# Altium PCB Motherboard.PcbDoc
Units mil, origin at the board's own origin, x right, y up, seen from the top; angles counter-clockwise.
Board outline 6000 x 4000 mil, 2 copper layers (Top Layer, Bottom Layer); 57 components, 99 nets, 359 pads, 0 vias.
Unrouted connection lines stored in the file: 239.
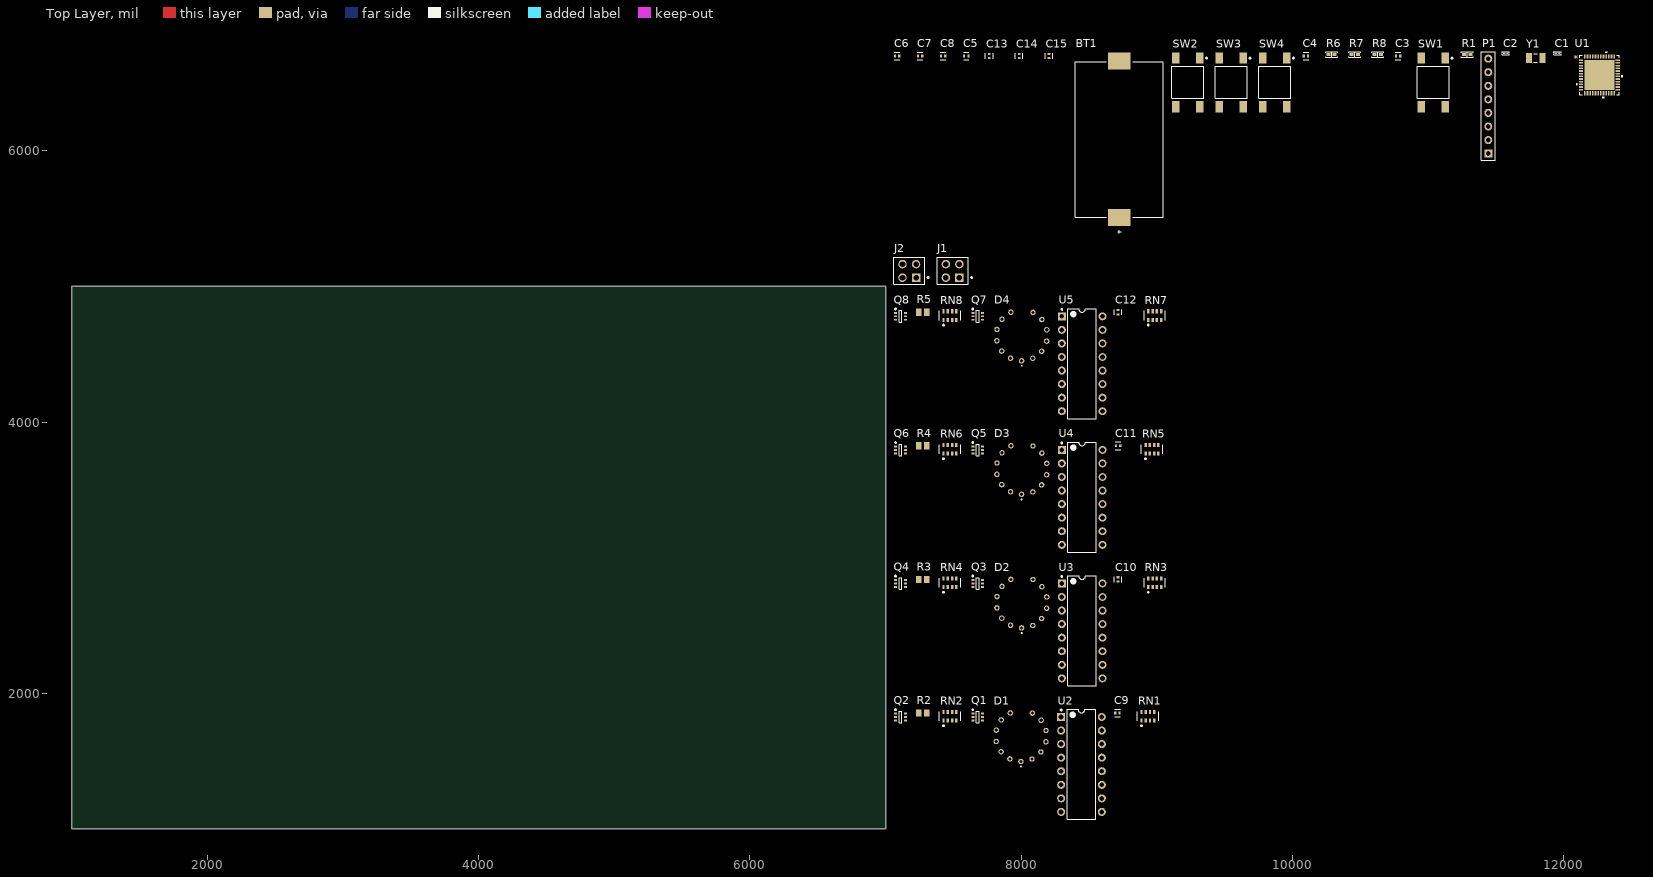
[diagram p0: Top Layer view]
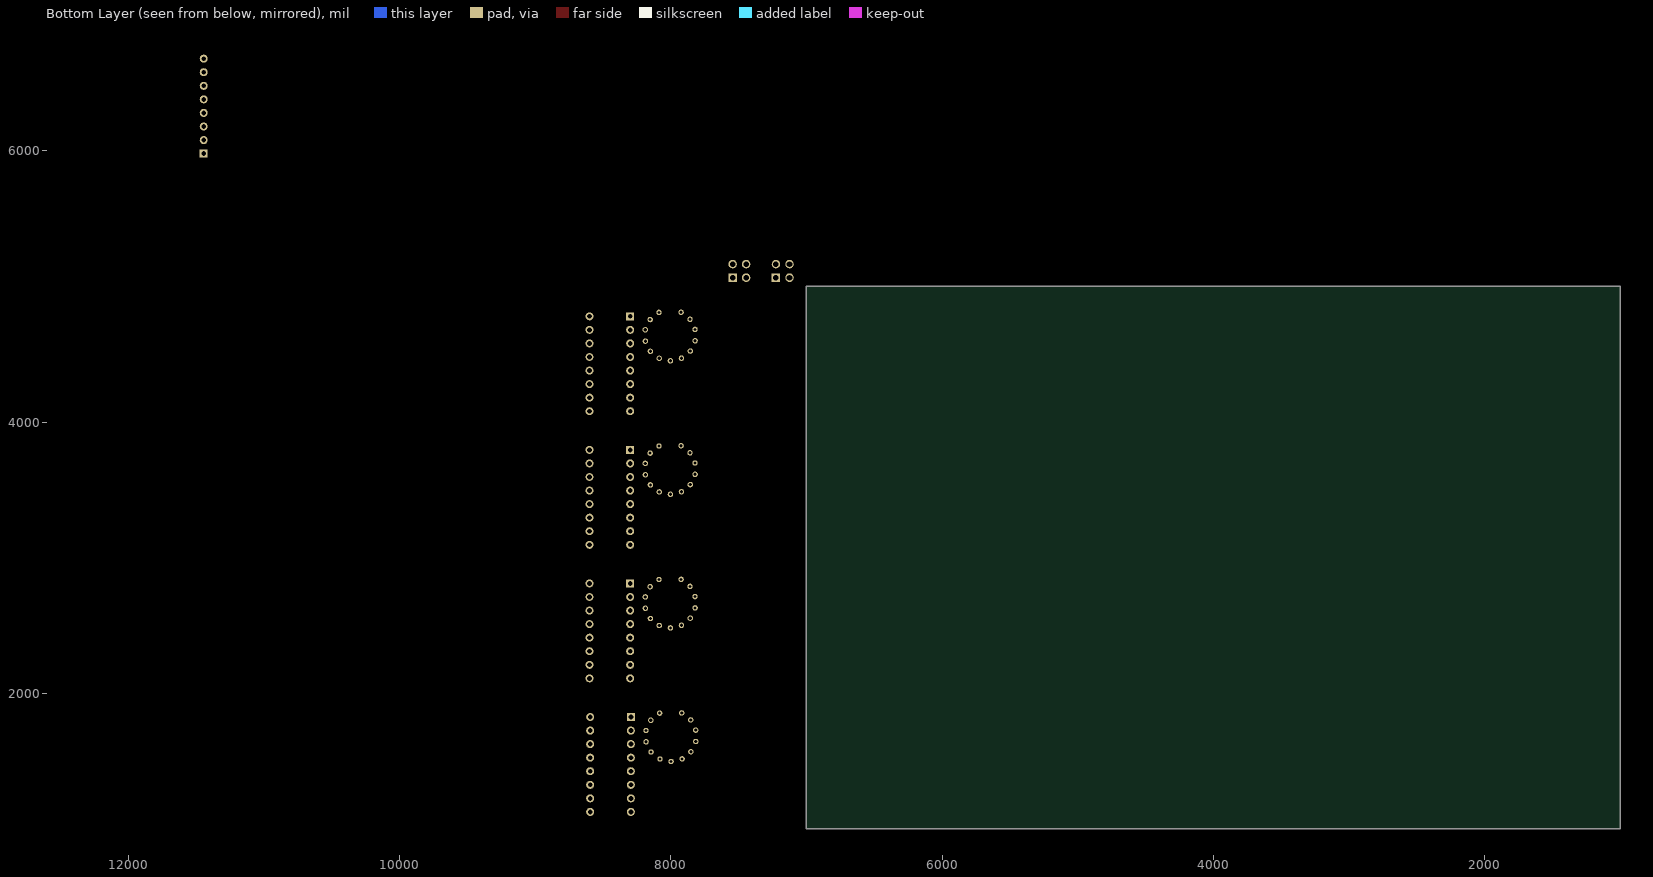
[diagram p1: Bottom Layer view, seen from below]

## Layer stack, top to bottom
Top Solder: solder mask 0.4, Solder Resist, Dk 3.5
Top Layer: signal copper 1.4
Dielectric 1: dielectric 12.6, FR-4, Dk 4.8
Bottom Layer: signal copper 1.4
Bottom Solder: solder mask 0.4, Solder Resist, Dk 3.5

## Board outline
1000,1000 7000,1000 7000,5000 1000,5000

## Design rules (kind name [scope] priority, off if disabled: settings)
Clearance [All] p1: gap=10 ignorepadtopadclearanceinfootprint=FALSE except(0: Arc-Hole Track-Hole SMDPad-Hole THPad-Hole Via-Hole Fill-Hole Poly-Hole Region-Hole Text-Hole)
PolygonConnect [All] p1: connectstyle=Relief reliefconductorwidth=10 reliefentries=4 polygonreliefangle="90 Angle" airgapwidth=10
RoomDefinition Designator_5 [InComponentClass('Designator')] p1: confinementstyle=ConfineIn formatcopy=TRUE lockcomponents=FALSE outline 7045,4015 9090,4015 9090,4950 7045,4950
RoomDefinition Designator_4 [InComponentClass('Designator')] p2: confinementstyle=ConfineIn formatcopy=TRUE lockcomponents=FALSE outline 7045,4015 9090,4015 9090,4950 7045,4950
RoomDefinition Designator_2 [InComponentClass('Designator')] p3: confinementstyle=ConfineIn formatcopy=TRUE lockcomponents=FALSE outline 7045,4015 9090,4015 9090,4950 7045,4950
RoomDefinition Designator [InComponentClass('Designator')] p4: confinementstyle=ConfineIn formatcopy=TRUE lockcomponents=FALSE outline 7045,4015 9090,4015 9090,4950 7045,4950
RoutingVias [All] p1: holewidth=28 width=50 viastyle="Through Hole" minholewidth=28 minwidth=50 maxholewidth=28 maxwidth=50
SolderMaskExpansion [All] p1: expansion=4 istentingtop=FALSE
Width [All] p1: maxlimit=10 minlimit=10 preferedwidth=10
30 further rules are at their usual default settings.

## Classes and differential pairs
component class Designator: C12 D4 Q7 Q8 R5 RN7 RN8 U5

## Components (designator, comment, footprint, x,y, rotation, side; value= is the part's Value field where it differs from the comment)
BT1 "CR2032-BS-6-1" FP-BU2032SM-BT-GTR-MFG 8725,6085 r90 top
C1 "10 pF" "CAP 0201_0603" 11955,6720 r0 top
C2 "10 pF" "CAP 0201_0603" 11575,6720 r0 top
C3 "100nF" FP-C1005-050-0_15-MFG 10780,6700 r0 top
C4 "4.7uF" FP-C1005-050-0_15-MFG 10100,6700 r0 top
C5 "1uF" FP-C1005-050-0_15-MFG 7595,6700 r0 top
C6 "100nF" FP-C1005-050-0_15-MFG 7085,6700 r0 top
C7 "100nF" FP-C1005-050-0_15-MFG 7255,6700 r0 top
C8 "100nF" FP-C1005-050-0_15-MFG 7425,6700 r0 top
C9 "100nF" FP-C1005-050-0_15-MFG 8710,1855 r0 top
C10 "100nF" FP-C1005-050-0_15-MFG 8715,2840 r90 top
C11 "100nF" FP-C1005-050-0_15-MFG 8715,3825 r0 top
C12 "100nF" FP-C1005-050-0_15-MFG 8715,4810 r90 top
C13 "100nF" FP-C1005-050-0_15-MFG 7765,6700 r90 top
C14 "100nF" FP-C1005-050-0_15-MFG 7985,6700 r90 top
C15 "100nF" FP-C1005-050-0_15-MFG 8205,6700 r90 top
D1 "Z5730M" Z5730M 8000,1685 r0 top
D2 "Z5730M" Z5730M 8005,2670 r0 top
D3 "Z5730M" Z5730M 8005,3655 r0 top
D4 "Z5730M" Z5730M 8005,4640 r0 top
J1 "SSW-102-02-G-D" FP-SSW-102-02-G-D-MFG 7495,5115 r0 top
J2 "SSW-102-02-G-D" FP-SSW-102-02-G-D-MFG 7175,5115 r0 top
P1 "Header 8" HDR1X8 11445,5980 r90 top
Q1 "PMGD780SN,115" NXP-SOT363_N 7680,1825 r0 top
Q2 "PMGD780SN,115" NXP-SOT363_N 7110,1825 r0 top
Q3 "PMGD780SN,115" NXP-SOT363_N 7680,2810 r0 top
Q4 "PMGD780SN,115" NXP-SOT363_N 7110,2810 r0 top
Q5 "PMGD780SN,115" NXP-SOT363_N 7680,3795 r0 top
Q6 "PMGD780SN,115" NXP-SOT363_N 7110,3795 r0 top
Q7 "PMGD780SN,115" NXP-SOT363_N 7680,4780 r0 top
Q8 "PMGD780SN,115" NXP-SOT363_N 7110,4780 r0 top
R1 "10 kOhms" "RES 0402_1005" 11290,6710 r0 top
R2 "18k" RESC2013X60X40LL20T25 7275,1855 r0 top
R3 "18k" RESC2013X60X40LL20T25 7275,2840 r0 top
R4 "18k" RESC2013X60X40LL20T25 7275,3825 r0 top
R5 "18k" RESC2013X60X40LL20T25 7275,4810 r0 top
R6 "10 kOhms" "RES 0402_1005" 10290,6710 r0 top
R7 "10 kOhms" "RES 0402_1005" 10460,6710 r0 top
R8 "10 kOhms" "RES 0402_1005" 10630,6710 r0 top
RN1 "10k 0603x4" FP-EXB38V-MFG 8935,1830 r0 top
RN2 "10k 0603x4" FP-EXB38V-MFG 7475,1830 r0 top
RN3 "10k 0603x4" FP-EXB38V-MFG 8985,2815 r0 top
RN4 "10k 0603x4" FP-EXB38V-MFG 7475,2815 r0 top
RN5 "10k 0603x4" FP-EXB38V-MFG 8965,3800 r0 top
RN6 "10k 0603x4" FP-EXB38V-MFG 7475,3800 r0 top
RN7 "10k 0603x4" FP-EXB38V-MFG 8985,4785 r0 top
RN8 "10k 0603x4" FP-EXB38V-MFG 7475,4785 r0 top
SW1 "FSM6JSMA" TECO-FSM6JSMA_V 11040,6505 r0 top
SW2 "FSM6JSMA" TECO-FSM6JSMA_V 9230,6505 r0 top
SW3 "FSM6JSMA" TECO-FSM6JSMA_V 9550,6505 r0 top
SW4 "FSM6JSMA" TECO-FSM6JSMA_V 9870,6505 r0 top
U1 "STM32F411CCU6TR" UFQFPN-48_7X7X0P55MM 12265,6560 r0 top
U2 "74141" DIP-16 8445,1475 r0 top
U3 "74141" DIP-16 8450,2460 r0 top
U4 "74141" DIP-16 8450,3445 r0 top
U5 "74141" DIP-16 8450,4430 r0 top
Y1 "ABS07-32.768KHZ-7-T" FP-ABS07-MFG 11795,6685 r0 top

## Footprints (in the part's own frame and the unit in brackets; to place one, negate y for a bottom-side part, rotate by r counter-clockwise, add the part's x,y. Pads: shape width x height; smd on the part's side, far side on the other; paste and mask are expansions set on the pad)
"CAP 0201_0603" [mm] "Chip Capacitor, 2-Leads, Body 0.60x0.30mm, IPC Medium Density"
  rect 0.4x0.35 smd: 1(-0.31,0) 2(0.31,0)
  silkscreen extent -0.67,-0.33 0.67,0.33, body extent -0.3,-0.15 0.3,0.15, height 0.3
DIP-16 [mm] "DIP; 16 Leads; Row Spacing 7.62 mm; Pitch 2.54 mm"
  rect 1.5x1.5 hole 0.9: 1(-3.81,8.89)
  round 1.5 hole 0.9: 2(-3.81,6.35) 3(-3.81,3.81) 4(-3.81,1.27) 5(-3.81,-1.27) 6(-3.81,-3.81) 7(-3.81,-6.35) 8(-3.81,-8.89) 9(3.81,-8.89) 10(3.81,-6.35) 11(3.81,-3.81) 12(3.81,-1.27) 13(3.81,1.27) 14(3.81,3.81) 15(3.81,6.35) 16(3.81,8.89)
  silkscreen extent -3.93,-10.3 2.65,10.31, body extent -3.6,-10.28 3.6,10.28, height 5.08
FP-ABS07-MFG [mm]
  rect 1.1x1.9 smd paste+0 mask+0: 1(-1.25,0) 2(1.25,0)
  silkscreen extent -0.33,-0.8 0.33,0.8, body extent -1.9,-1.05 1.9,1.05, height 0.25
FP-BU2032SM-BT-GTR-MFG [mm]
  rect 3.2x4.2 smd paste+0 mask+0: 1(14.65,0) 2(-14.65,0)
  silkscreen extent -17.6,-8.25 14.55,8.25, body extent -16.35,-8.35 16.35,8.35, height 0.25
FP-C1005-050-0_15-MFG [mm]
  rect 0.4x0.5 smd paste+0 mask+0: 1(-0.4,0) 2(0.4,0)
  silkscreen extent -0.5,-0.72 0.5,0.72, body extent -0.7,-0.43 0.7,0.43, height 0.25
FP-EXB38V-MFG [mm]
  rect 0.45x0.8 smd paste+0 mask+0: 1(-1.2,-0.8) 2(-0.4,-0.8) 3(0.4,-0.8) 4(1.2,-0.8) 5(1.2,0.8) 6(0.4,0.8) 7(-0.4,0.8) 8(-1.2,0.8)
  silkscreen extent -2,-1.9 2,0.87, body extent -1.8,-1.3 1.8,1.3, height 0.25
FP-SSW-102-02-G-D-MFG [mm]
  rect 1.59x1.59 hole 1.04 paste-1000 mask+0: 1(1.27,-1.27)
  round 1.59 hole 1.04 paste-1000 mask+0: 2(1.27,1.27) 3(-1.27,-1.27) 4(-1.27,1.27)
  silkscreen extent -2.92,-2.54 3.66,2.54, body extent -3.02,-2.64 3.02,2.64, height 0.25
HDR1X8 [mm] "Connector; Header; 8 Position"
  rect 1.5x1.5 hole 0.9: 1(0,0)
  round 1.5 hole 0.9: 2(2.54,0) 3(5.08,0) 4(7.62,0) 5(10.16,0) 6(12.7,0) 7(15.24,0) 8(17.78,0)
  silkscreen extent -1.27,-1.27 19.05,1.27
NXP-SOT363_N [mm] "SOT23, 6-Leads, Body 2.2x1.35mm, Pitch 0.65mm, IPC Medium Density"
  rect 0.55x0.35 smd: 1(-0.925,0.65) 2(-0.925,0) 3(-0.925,-0.65) 4(0.925,-0.65) 5(0.925,0) 6(0.925,0.65)
  silkscreen extent -1.05,-1.1 0.25,1.5, body extent -0.67,-1.1 0.67,1.1, height 1.1
"RES 0402_1005" [mm] "Chip Resistor, 2-Leads, Body 1.0x0.5mm, IPC Medium Density"
  rect 0.75x0.6 smd: 1(-0.575,0) 2(0.575,0)
  silkscreen extent -1.14,-0.51 1.14,0.51, body extent -0.5,-0.25 0.5,0.25, height 0.35
RESC2013X60X40LL20T25 [mm] "Chip Resistor, 2-Leads, Body 2.00x1.25mm, IPC High Density"
  rect 1x1.35 smd: 1(-0.75,0) 2(0.75,0)
  body extent -1.1,-0.72 1.1,0.72, height 0.6
TECO-FSM6JSMA_V [mm] "SMD, 4-Leads, Body 6x6mm, Pitch 4.5mm"
  rect 1.4x2.1 smd: 1(2.25,4.55) 2(2.25,-4.55) 3(-2.25,4.55) 4(-2.25,-4.55)
  silkscreen extent -3,-3 3.63,4.67, body extent -3,-5 3,5, height 7.11
UFQFPN-48_7X7X0P55MM [mil]
  rect 32x12 smd paste+0 mask+0: 1(-136,108.27) 2(-136,88.58) 3(-136,68.9) 4(-136,49.21) 5(-136,29.53) 6(-136,9.84) 7(-136,-9.84) 8(-136,-29.53) 9(-136,-49.21) 10(-136,-68.9) 11(-136,-88.58) 12(-136,-108.27) 25(136,-108.27) 26(136,-88.58) 27(136,-68.9) 28(136,-49.21) 29(136,-29.53) 30(136,-9.84) 31(136,9.84) 32(136,29.53) 33(136,49.21) 34(136,68.9) 35(136,88.58) 36(136,108.27)
  rect 12x32 smd paste+0 mask+0: 13(-108.27,-136) 14(-88.58,-136) 15(-68.9,-136) 16(-49.21,-136) 17(-29.53,-136) 18(-9.84,-136) 19(9.84,-136) 20(29.53,-136) 21(49.21,-136) 22(68.9,-136) 23(88.58,-136) 24(108.27,-136) 37(108.27,136) 38(88.58,136) 39(68.9,136) 40(49.21,136) 41(29.53,136) 42(9.84,136) 43(-9.84,136) 44(-29.53,136) 45(-49.21,136) 46(-68.9,136) 47(-88.58,136) 48(-108.27,136)
  rect 224x224 smd paste-111.5 mask+0: 49(0,0)
  silkscreen extent -172,-172 172,172, body extent -140,-140 140,140, height 24
Z5730M [mil]
  round 40 hole 23.62: 1(82.84,168.76) 2(147.86,116.11) 3(183.6,40.45) 4(182.97,-43.21) 5(146.1,-118.32) 6(80.3,-169.99) 7(-1.41,-187.99) 8(-82.84,-168.77) 9(-147.86,-116.11) 10(-183.59,-40.46) 11(-182.97,43.2) 12(-146.1,118.31) 13(-80.29,169.99)
  silkscreen extent -3,-227 2,-223

## Part data
BT1: library part CMP-136216-000002-1, Case/Package=SMD/SMT, Max Operating Temperature=280°C, Min Operating Temperature=-40°C, Package Quantity=400, Mount="Surface Mount", Number of Cells=1, Termination=SMD/SMT
C1 C2: library part C0201C100J3GAC7867, "CAP CER 10PF 25V C0G/NP0 0201", Device Package="0201 (0603 Metric)", manufacturer=KEMET, Operating Temperature="-55°C ~ 125°C", Supplier Part Number 1=399-14856-1-ND, Temperature Coefficient="C0G, NP0", Tolerance=±5%, Voltage - Rated=25V, Applications="General Purpose", Capacitance="10 pF", componentlink1description=Datasheet, componentlink1url=https://api.kemet.com/component-edge/download/datasheet/C0201C100J3GAC7867.pdf, componentlink2description="DigiKey Link", componentlink2url=https://www.digikey.com/en/products/detail/kemet/C0201C100J3GAC7867/7381972, Features="Low ESL", lastupdated="13.03.2023 19:01:22", Lifecycle Status=Active, Minimum Order=1, Mounting Type="Surface Mount, MLCC", Package / Case="0201 (0603 Metric)", packaging=TapeAndReel, Part Number=C0201C100J3GAC7867, Part Status=Active, partid=4, price=0.02, series="SMD Comm C0G", Size / Dimension="0.024\" L x 0.012\" W (0.60mm x 0.30mm)", Supplier 1=DigiKey, Thickness (Max)="0.013\" (0.33mm)"
C3 C6 C7 C8 C9 C10 C11 C12 C13 C14 C15: library part CMP-2000-05438-2, "CAP CER 100nF 10V X5R 0402", Capacitance=4.7uF, Case Code (Imperial)=0402, Case Code (Metric)=1005, Dielectric=X5R, Dielectric Material=Ceramic, Max Operating Temperature=85°C, Min Operating Temperature=-55°C, Package Quantity=1, Tolerance=20%, Voltage=10V, Case/Package=0402, Construction=Flat, Depth=0.5mm, Height=0.5mm, Lead Free="Lead Free", Length=1mm, Mount="Surface Mount", packaging="Tape and Reel", Radiation Hardening=No, REACH SVHC="No SVHC", Resistor Type=Ceramic, RoHS Compliant=Yes, series=C, Termination=SMD/SMT, Thickness=500um, Voltage Rating=10V, Voltage Rating (DC)=10V, Weight=2.3E-05oz, Width=0.02inch
C4: library part CMP-2000-05438-2, "CAP CER 4.7UF 10V X5R 0402", Case Code (Imperial)=0402, Case Code (Metric)=1005, Dielectric=X5R, Dielectric Material=Ceramic, Max Operating Temperature=85°C, Min Operating Temperature=-55°C, Package Quantity=1, Tolerance=20%, Voltage=10V, Capacitance=4.7uF, Case/Package=0402, Construction=Flat, Depth=0.5mm, Height=0.5mm, Lead Free="Lead Free", Length=1mm, Mount="Surface Mount", packaging="Tape and Reel", Radiation Hardening=No, REACH SVHC="No SVHC", Resistor Type=Ceramic, RoHS Compliant=Yes, series=C, Termination=SMD/SMT, Thickness=500um, Voltage Rating=10V, Voltage Rating (DC)=10V, Weight=2.3E-05oz, Width=0.02inch
C5: library part CMP-2000-05438-2, "CAP CER 1UF 10V X5R 0402", Capacitance=4.7uF, Case Code (Imperial)=0402, Case Code (Metric)=1005, Dielectric=X5R, Dielectric Material=Ceramic, Max Operating Temperature=85°C, Min Operating Temperature=-55°C, Package Quantity=1, Tolerance=20%, Voltage=10V, Case/Package=0402, Construction=Flat, Depth=0.5mm, Height=0.5mm, Lead Free="Lead Free", Length=1mm, Mount="Surface Mount", packaging="Tape and Reel", Radiation Hardening=No, REACH SVHC="No SVHC", Resistor Type=Ceramic, RoHS Compliant=Yes, series=C, Termination=SMD/SMT, Thickness=500um, Voltage Rating=10V, Voltage Rating (DC)=10V, Weight=2.3E-05oz, Width=0.02inch
J1 J2: library part CMP-02766-000581-1, "CONN RCPT 4POS 0.1 GOLD PCB", Color=Black, Current Rating=6.9A, Voltage Rating=550V, Connector Type=Receptacle, Contact Material=Bronze, Contact Plating=Gold, Gender=Receptacle, Housing Color=Black, Housing Material=Plastic, Lead Free="Lead Free", Mating Cycles=100, Mount="Through Hole", Number of Contacts=4, Number of Positions=4, Number of Rows=2, Orientation=Straight, packaging=Bulk, Pitch=2.54mm, Radiation Hardening=No, REACH SVHC="No SVHC", Row Spacing=0.1inch, Termination=Solder
P1: "Header, 8-Pin", LatestRevisionDate=17-Jul-2002, LatestRevisionNote="Re-released for DXP Platform.", Publisher="Altium Limited"
Q1 Q2 Q3 Q4 Q5 Q6 Q7 Q8: library part CMP-1258-00177-1, "Dual N-Channel uTrenchMOS Standard Level FET, 60 V, 0.49 A, 6-Pin SOT363, Tape and Reel", manufacturer="NXP Semiconductors", Channel Type=N, Ciss [typ] (pF)=23, Code_JEITA=SC-88, componentlink1description="Manufacturer URL", componentlink1url=http://www.nxp.com/, componentlink2description=Datasheet, componentlink2url=http://www.nxp.com/documents/data_sheet/PMGD780SN.pdf, ComponentLink3Description="Package Specification", ComponentLink3URL=http://www.nxp.com/documents/outline_drawing/sot363_po.pdf, Coss [typ] (pF)=5, DatasheetVersion="Rev. 02", ID [max] (A)=0.49, Mounting Technology="Surface Mount", PackageDescription="6-Pin Small Outline Transistor Package, Body 2 x 1.25 mm, Pitch 0.65 mm", PackageReference=SOT363, PackageVersion="06-03-16, 03/2006", Packing="Tape & Reel", PartNumber=PMGD780SN,115, VDS [max] (V)=60, VGSth [typ] (V)=2
R1 R6 R7 R8: library part TNPW040210K0BETD, "RES 10K OHM 1% 1/16W 0402", Device Package="0402 (1005 Metric)", manufacturer="Vishay Dale", Operating Temperature="-55°C ~ 125°C", Power (Watts)="0.063W, 1/16W", Supplier Device Package=0402, Supplier Part Number 1=541-3559-1-ND, Temperature Coefficient=±25ppm/°C, Tolerance=±0.1%, componentlink1description=Datasheet, componentlink1url=http://www.vishay.com/docs/31006/tnpw.pdf, componentlink2description="DigiKey Link", componentlink2url=https://www.digikey.com/en/products/detail/vishay-dale/TNPW040210K0BETD/1613222, Composition="Thin Film", Features=Military, Height - Seated (Max)="0.016\" (0.40mm)", lastupdated="13.03.2023 19:23:30", Lifecycle Status=Active, Minimum Order=1, Number of Terminations=2, Package / Case="0402 (1005 Metric)", packaging=TapeAndReel, Part Number=TNPW040210K0BETD, Part Status=Active, partid=3021, price=0.25, Resistance="10 kOhms", series=TNPW, Size / Dimension="0.039\" L x 0.020\" W (1.00mm x 0.50mm)", Supplier 1=DigiKey
R2 R3 R4 R5: library part CMP-2001-00606-1, manufacturer=Panasonic, Part Number=ERA6AEB183V
RN1 RN2 RN3 RN4 RN5 RN6 RN7 RN8: library part CMP-2000-05314-2, "RES ARRAY 4 RES 10K OHM 1206 / RC-ML08W103JT", Case Code (Imperial)=1206, Case Code (Metric)=3216, Max Operating Temperature=125°C, Min Operating Temperature=-55°C, Number of Resistors=4, Package Quantity=1, Power Dissipation=63mW, Power Per Element=62.5mW, Resistance=10kR, Resistance Tolerance=5%, Temperature Coefficient=200ppm/°C, Voltage Rating=50V, Voltage Rating (DC)=100V, Case/Package=1206, Circuit Type=Isolated, Contact Plating=Tin, Depth=1.6mm, Height=0.5mm, Lead Free="Lead Free", Length=3.2mm, Military Standard=Not, Mount="Surface Mount", Number of Contacts=8, Number of Elements=4, Number of Pins=8, Number of Terminals/Pins=8, packaging="Tape and Reel", Radiation Hardening=No, RoHS Compliant=Yes, series=EXB, Size Code=0603, Technology="THICK FILM", Terminal Pitch=0.8mm, Termination=Convex, Tolerance=5%, Width=1.6mm
SW1 SW2 SW3 SW4: library part CMP-2000-07503-1, "Switch, SPST, 24 V, -35 to 85 degC, 4-Pin SMD, RoHS, Tape and Reel", Case\/Package=SMD/SMT, Contact Current Rating=50mA, Contact Resistance=100mOhm, Insulation Resistance=100MOhm, manufacturer="TE Connectivity", Max Operating Temperature=85degC, Max Voltage Rating (DC)=12V, Min Operating Temperature=-35degC, Operating Force=1.57N, Package Description="4-Pin Surface Mount Device, Body 6 x 6 mm, Pitch 4.5 mm", Package Quantity=750, Voltage Rating=24V, Actuator Length=3.4mm, Actuator Material=Polyamide, Contact Material=CopperAlloy, Contact Plating=Silver, Current Rating=50mA, Datasheet URL=http://www.te.com/commerce/DocumentDelivery/DDEController?Action=showdoc&DocId=Customer+Drawing%7F2-1437565-7%7FV%7Fpdf%7FEnglish%7FENG_CD_2-1437565-7_V.pdf%7F4-1437565-9, Datasheet Version="Rev. V, 02/2015", Electrical Life=100000Cycles, ELV=Compliant, Illumination Type=Illuminated, Lead Free=LeadFree, Length=6mm, Manufacturer URL=http://www.te.com/, Mechanical Life=100000Cycles, Mount=SurfaceMount, Mounting Technology=SurfaceMount, Orientation=Straight, Package Reference=FSM6JSMA, packaging=LoosePiece, REACH SVHC=Unknown, RoHSCompliant=true, Switch Travel=0.25mm, Termination=GullWing, Throw Configuration=SPST, Voltage Rating (DC)=24V, Width=6mm
U1: "No Description Available", Mfr_Name=STMicroelectronics, Copyright="Copyright (C) 2023 Ultra Librarian. All rights reserved.", Manufacturer_Part_Number=STM32F411CCU6TR, RefDes=RefDes, Type=DEV
Y1: library part CMP-27762-013661-2, "Crystal 32.768kHz ±20ppm (Tol) 9pF FUND 70kΩ 2-Pin CSMD T/R", Case/Package=CSMD, ESR (Equivalent Series Resistance)=70kR, Frequency=32.768kHz, Frequency Stability=20ppm, Insulation Resistance=500MR, Load Capacitance=9pF, Max Operating Temperature=85°C, Min Operating Temperature=-40°C, Operating Frequency="32.768 kHz", Package Quantity=3000, Depth=1.5mm, Frequency Tolerance=20ppm, Height=0.9mm, Lead Free="Lead Free", Length=3.2mm, Mount="Surface Mount", Number of Pins=2, packaging="Tape and Reel", Radiation Hardening=No, REACH SVHC="No SVHC", RoHS Compliant=Yes, series=ABS07, Series Resistance=70kR, Termination=SMD/SMT, Tolerance=20ppm, Width=1.5mm

## Nets (pads, with @x,y where several pads share a name; then routed paths per layer and width w, separated by ;. In a path a pad name is that pad's centre, name@x,y a point inside that pad or via, vN(x,y) a via of type N, cw(c..) or ccw(c..) an arc to the next point about the centre after c; other vN are vias at no path point)
+3.3: C6.2 C7.2 C8.2 P1.1 Q1.2 Q1.5 Q2.2 Q2.5 Q3.2 Q3.5 Q4.2 Q4.5 Q5.2 Q5.5 Q6.2 Q6.5 Q7.2 Q7.5 Q8.2 Q8.5 R6.2 R7.2 R8.2 RN1.3 RN1.4 RN2.3 RN2.4 RN3.3 RN3.4 RN4.3 RN4.4 RN5.3 RN5.4 RN6.3 RN6.4 RN7.3 RN7.4 RN8.3 RN8.4 U1.9 U1.24 U1.36 U1.48
+5: C9.2 C10.2 C11.2 C12.2 RN1.1 RN1.2 RN2.1 RN2.2 RN3.1 RN3.2 RN4.1 RN4.2 RN5.1 RN5.2 RN6.1 RN6.2 RN7.1 RN7.2 RN8.1 RN8.2 U2.5 U3.5 U4.5 U5.5
+12: J2.1 J2.3
BUTTON_1: C15.1 SW4.3 U1.26
BUTTON_2: C14.1 SW3.3 U1.27
BUTTON_3: C13.1 SW2.3 U1.29
GND: BT1.1 C1.2 C2.2 C3.1 C4.2 C5.1 C6.1 C7.1 C8.1 C9.1 C10.1 C11.1 C12.1 C13.2 C14.2 C15.2 J1.2 J1.4 J2.2 J2.4 P1.8 R1.1 SW1.3 SW1.4 SW2.1 SW3.1 SW4.1 U1.8 U1.23 U1.35 U1.47 U1.49 U2.12 U3.12 U4.12 U5.12
HV: J1.1 J1.3 R2.1 R3.1 R4.1 R5.1
IC1_A: Q1.6 RN1.7 U2.3
IC1_B: Q1.3 RN1.8 U2.6
IC1_C: Q2.6 RN2.7 U2.7
IC1_D: Q2.3 RN2.8 U2.4
IC2_A: Q3.6 RN3.7 U3.3
IC2_B: Q3.3 RN3.8 U3.6
IC2_C: Q4.6 RN4.7 U3.7
IC2_D: Q4.3 RN4.8 U3.4
IC3_A: Q5.6 RN5.7 U4.3
IC3_B: Q5.3 RN5.8 U4.6
IC3_C: Q6.6 RN6.7 U4.7
IC3_D: Q6.3 RN6.8 U4.4
IC4_A: Q7.6 RN7.7 U5.3
IC4_B: Q7.3 RN7.8 U5.6
IC4_C: Q8.6 RN8.7 U5.7
IC4_D: Q8.3 RN8.8 U5.4
NetBT1_2: BT1.2 C5.2 U1.1
NetC1_1: C1.1 U1.3 Y1.2
NetC2_1: C2.1 U1.4 Y1.1
NetC3_2: C3.2 SW1.1
NetC4_1: C4.1 U1.22
NetD1_1: D1.1 U2.15
NetD1_2: D1.2 U2.8
NetD1_3: D1.3 U2.9
NetD1_5: D1.5 U2.13
NetD1_6: D1.6 U2.14
NetD1_7: D1.7 U2.11
NetD1_8: D1.8 U2.10
NetD1_9: D1.9 U2.1
NetD1_11: D1.11 U2.2
NetD1_12: D1.12 U2.16
NetD1_13: D1.13 R2.2
NetD2_1: D2.1 U3.15
NetD2_2: D2.2 U3.8
NetD2_3: D2.3 U3.9
NetD2_5: D2.5 U3.13
NetD2_6: D2.6 U3.14
NetD2_7: D2.7 U3.11
NetD2_8: D2.8 U3.10
NetD2_9: D2.9 U3.1
NetD2_11: D2.11 U3.2
NetD2_12: D2.12 U3.16
NetD2_13: D2.13 R3.2
NetD3_1: D3.1 U4.15
NetD3_2: D3.2 U4.8
NetD3_3: D3.3 U4.9
NetD3_5: D3.5 U4.13
NetD3_6: D3.6 U4.14
NetD3_7: D3.7 U4.11
NetD3_8: D3.8 U4.10
NetD3_9: D3.9 U4.1
NetD3_11: D3.11 U4.2
NetD3_12: D3.12 U4.16
NetD3_13: D3.13 R4.2
NetD4_1: D4.1 U5.15
NetD4_2: D4.2 U5.8
NetD4_3: D4.3 U5.9
NetD4_5: D4.5 U5.13
NetD4_6: D4.6 U5.14
NetD4_7: D4.7 U5.11
NetD4_8: D4.8 U5.10
NetD4_9: D4.9 U5.1
NetD4_11: D4.11 U5.2
NetD4_12: D4.12 U5.16
NetD4_13: D4.13 R5.2
NetQ1_1: Q1.1 RN1.5 U1.40
NetQ1_4: Q1.4 RN1.6 U1.41
NetQ2_1: Q2.1 RN2.5 U1.42
NetQ2_4: Q2.4 RN2.6 U1.43
NetQ3_1: Q3.1 RN3.5 U1.30
NetQ3_4: Q3.4 RN3.6 U1.31
NetQ4_1: Q4.1 RN4.5 U1.32
NetQ4_4: Q4.4 RN4.6 U1.33
NetQ5_1: Q5.1 RN5.5 U1.15
NetQ5_4: Q5.4 RN5.6 U1.16
NetQ6_1: Q6.1 RN6.5 U1.17
NetQ6_4: Q6.4 RN6.6 U1.18
NetQ7_1: Q7.1 RN7.5 U1.19
NetQ7_4: Q7.4 RN7.6 U1.20
NetQ8_1: Q8.1 RN8.5 U1.21
NetQ8_4: Q8.4 RN8.6 U1.25
NetR1_2: R1.2 U1.44
NetR6_1: R6.1 SW2.4
NetR7_1: R7.1 SW3.4
NetR8_1: R8.1 SW4.4
ST_NRST: P1.6 SW1.2 U1.7
ST_SWCLK: P1.5 U1.37
ST_SWDIO: P1.4 U1.34
ST_SWO: P1.7 U1.39
ST_USART_RX: P1.3 U1.13
ST_USART_TX: P1.2 U1.12
pads on no net: D1.4 D1.10 D2.4 D2.10 D3.4 D3.10 D4.4 D4.10 SW2.2 SW3.2 SW4.2 U1.2 U1.5 U1.6 U1.10 U1.11 U1.14 U1.28 U1.38 U1.45 U1.46

## Text inside footprints (layer, text, board x,y; h text height)
U1: Mechanical 13 "*" at 12132.5,6653.11 h50; Top Overlay "*" at 12075.5,6653.11 h50